# Altium PCB Main_Board.PcbDoc (part 7 of 14)
Units mm, origin at the board's own origin, x right, y up, seen from the top; angles counter-clockwise.
Board outline 142 x 82 mm, 10 copper layers (L1_Top, L2_PWR1, L3_Sig1, L4_GND1, L5_Sig2, L6_Sig3, L7_GND2, L8_Sig4, L9_GND3, L8_Bottom), stack 1.71 mm thick; 299 components, 328 nets, 2329 pads, 2908 vias.
Unrouted connection lines stored in the file: 2.
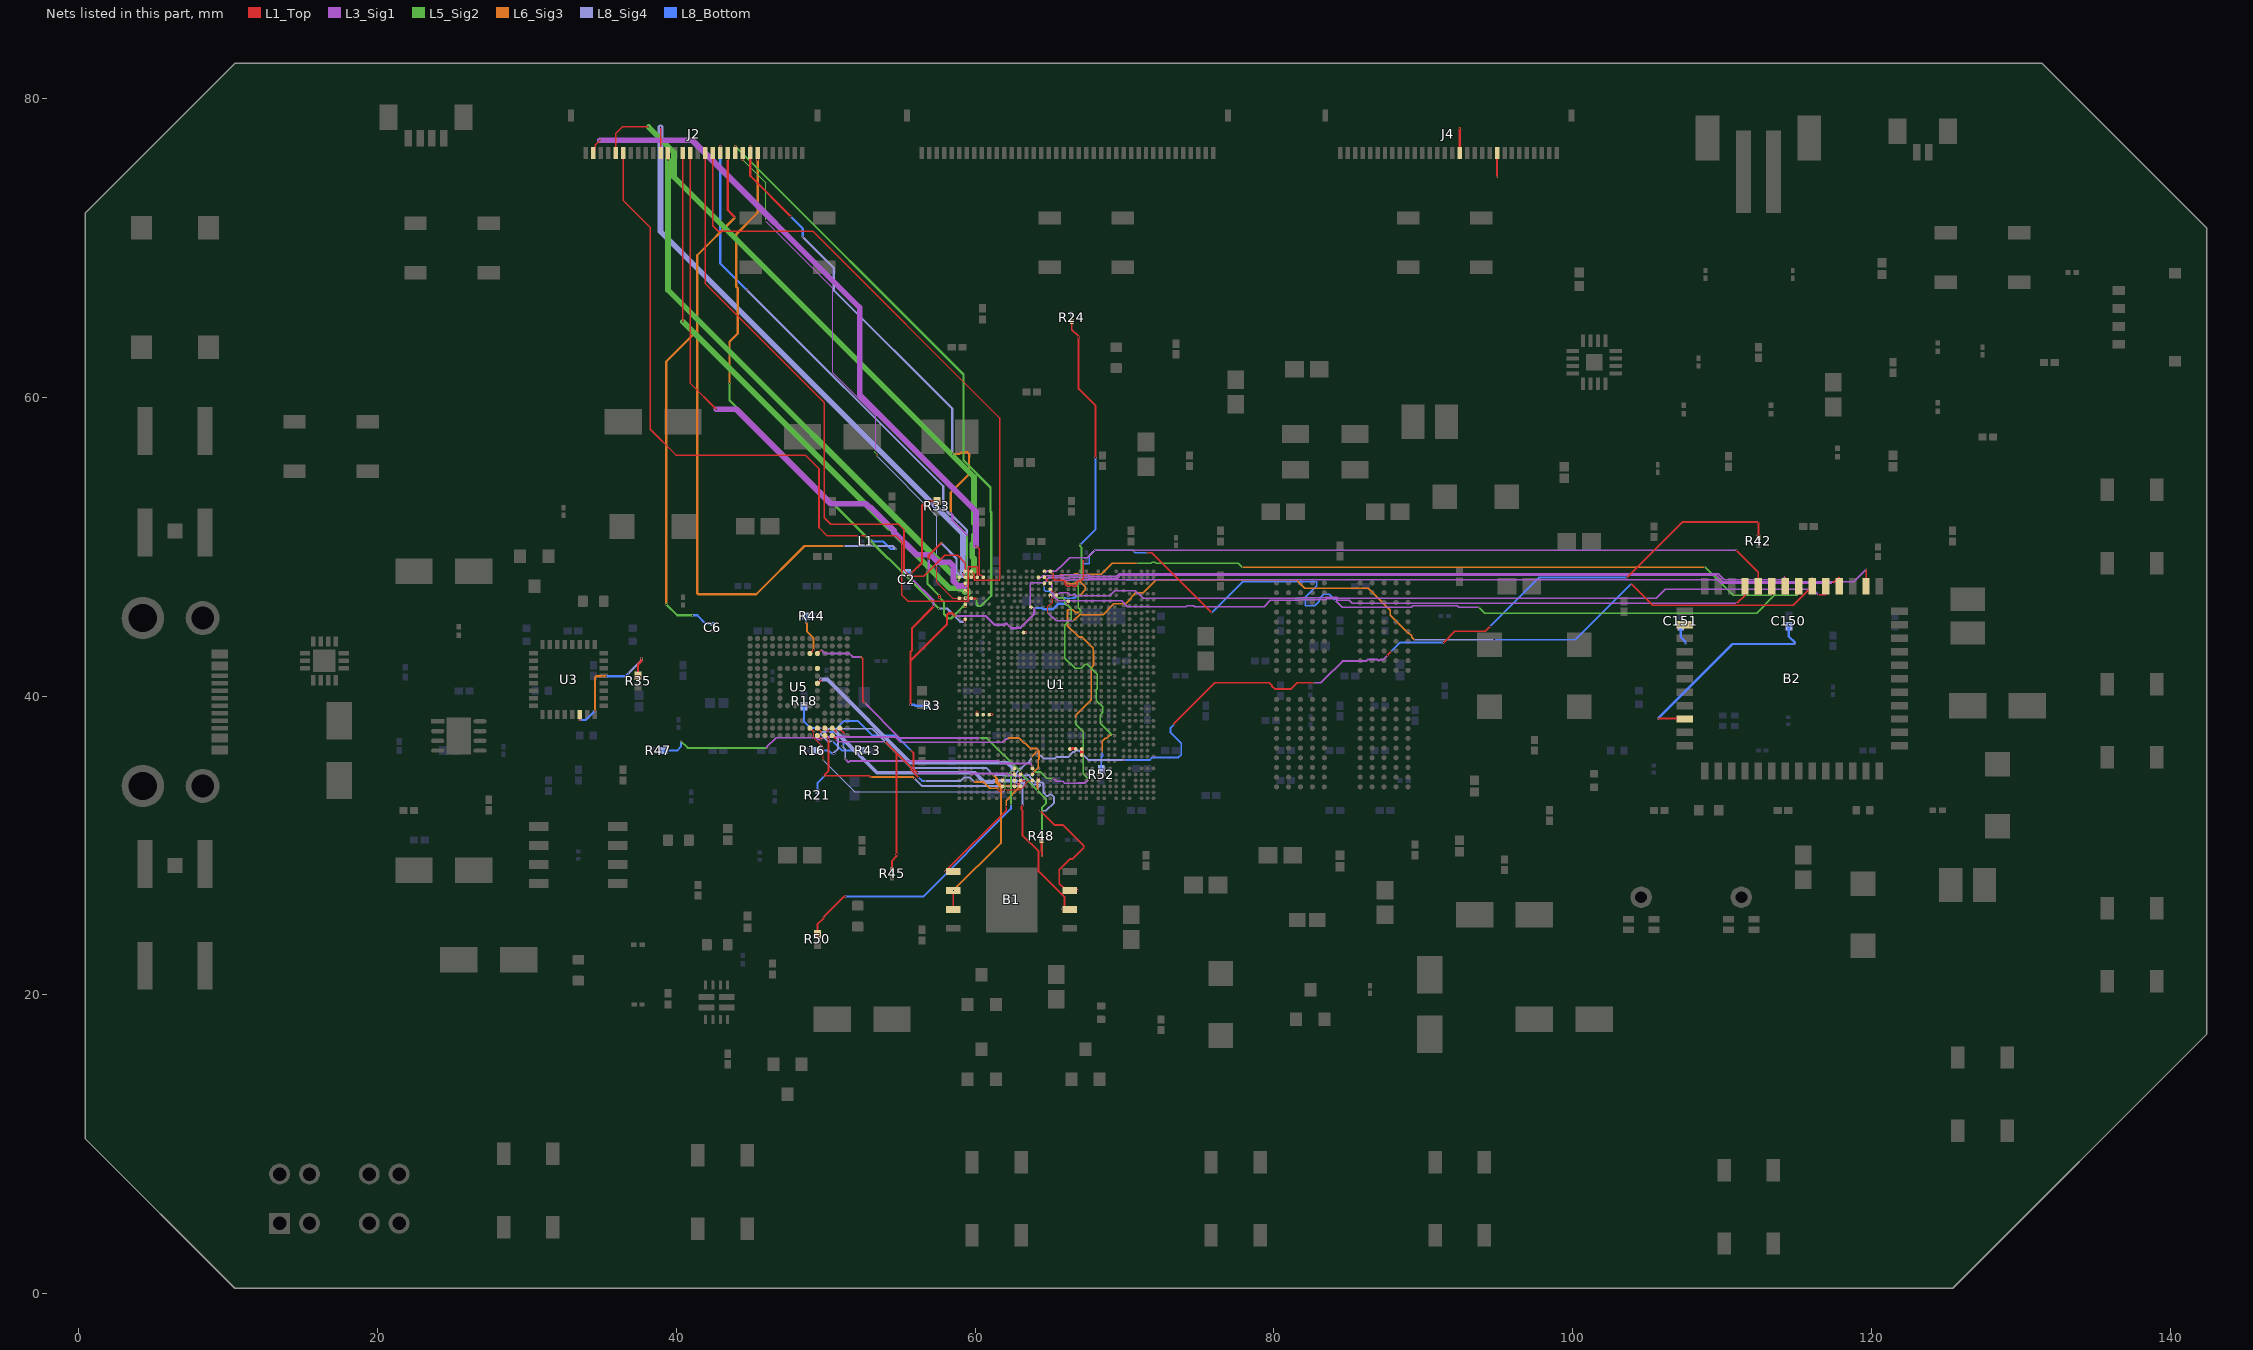
[diagram p14: the nets of this part, all layers, seen from the top]

## Via types
v1: diameter 0.1, hole 0.08, L1_Top to L8_Bottom, 1169 vias
v2: diameter 0.01, hole 0.01, L3_Sig1 to L8_Sig4, 433 vias
v3: diameter 0.01, hole 0.01, L8_Sig4 to L8_Bottom, 375 vias
v4: diameter 0.01, hole 0.01, L1_Top to L3_Sig1, 355 vias
v5: diameter 0.254, hole 0.01, L1_Top to L8_Bottom, 150 vias
v6: diameter 0.01, hole 0.01, L6_Sig3 to L8_Bottom, 129 vias
v7: diameter 0.05, hole 0.04, L1_Top to L8_Bottom, 104 vias
v8: diameter 0.01, hole 0.01, L1_Top to L5_Sig2, 89 vias
v9: diameter 0.01, hole 0.01, L1_Top to L8_Bottom, 41 vias
v10: diameter 0.1, hole 0.08, L1_Top to L3_Sig1, 17 vias
v11: diameter 0.1, hole 0.08, L1_Top to L5_Sig2, 11 vias
v12: diameter 0.1, hole 0.08, L8_Sig4 to L8_Bottom, 10 vias
v13: diameter 0.1, hole 0.08, L6_Sig3 to L8_Bottom, 9 vias
v14: diameter 1.27, hole 0.711, L1_Top to L8_Bottom, 8 vias
v15: diameter 0.4, hole 0.2, L1_Top to L8_Bottom, 4 vias
v16: diameter 0.05, hole 0.08, L1_Top to L8_Bottom, 3 vias
v17: diameter 0.05, hole 0.08, L6_Sig3 to L8_Bottom, 1 vias

## Nets (pads, with @x,y where several pads share a name; then routed paths per layer and width w, separated by ;. In a path a pad name is that pad's centre, name@x,y a point inside that pad or via, vN(x,y) a via of type N, cw(c..) or ccw(c..) an arc to the next point about the centre after c; other vN are vias at no path point) (continued)
BTUART_C_CTS_N: (continued)
  L8_Sig4 w0.1: v6(89.408,43.758) 89.43,43.78 v3(94.754,43.78)
  L8_Bottom w0.04: v4(65.041,46.662) 65.162,46.662 v3(65.286,46.538)
  L8_Bottom w0.1: v3(94.754,43.78) 100.177,43.78 v4(103.917,47.52)
  other v2: 65.286,46.538 65.041,46.662 103.917,47.52
  other v3: 65.041,46.662 103.917,47.52
  other v4: 65.286,46.538
BTUART_C_RTS_N: B2.43 U1.A18 | length 60.8
  L1_Top w0.1: U1.A18@65.041,48.349 65.041,48.309 65.156,48.194 v1(65.156,48.177) ; v1@65.185,48.206 65.216,48.174 65.249,48.174 65.246,48.172 65.246,47.868 65.368,47.747 65.92,47.747 66.041,47.625 66.041,47.473 66.161,47.354 66.322,47.354 66.397,47.429 66.486,47.429 66.561,47.354 66.722,47.354 66.841,47.473 66.841,47.625 66.961,47.744 67.112,47.744 67.236,47.868 67.236,49.146 v4(67.24,49.149) ; v4(71.5,49.588) 71.83,49.588 v3(75.845,45.573) ; v1(115.141,46.737) B2.43@115.141,47.349
  L3_Sig1 w0.1: v2(84.128,46.387) 84.587,45.928 89.187,45.928 89.294,46.035 92.268,46.035 92.367,45.936 v8(93.731,45.936)
  L5_Sig2 w0.1: v8(93.731,45.936) 94.126,45.541 112.316,45.541 113.511,46.737 v1(115.141,46.737)
  L8_Sig4 w0.1: v3(68.006,49.751) 70.556,49.751 v3(70.631,49.676)
  L8_Bottom w0.1: v4(67.24,49.149) 67.24,48.889 67.281,48.848 67.602,48.848 67.643,48.889 67.643,49.301 67.636,49.308 67.636,49.391 67.996,49.751 v3(68.006,49.751) ; v3(70.631,49.676) 70.719,49.588 v4(71.5,49.588) ; v3(75.845,45.573) 77.918,47.646 82.869,47.646 82.869,47.384 82.094,46.61 82.094,46.089 82.135,46.048 82.75,46.048 83.04,46.338 83.04,46.528 83.33,46.818 83.697,46.818 v2(84.128,46.387)
  other v2: 75.845,45.573 67.24,49.149 71.5,49.588
  other v3: 84.128,46.387 67.24,49.149 71.5,49.588
  other v4: 75.845,45.573
BTUART_C_RX: B2.40 U1.C18 | length 53.8
  L1_Top w0.1: U1.C18@65.041,47.549 65.041,47.551 v1(65.21,47.72) ; v1(117.421,47.542) 117.841,47.962 B2.40@117.841,47.349
  L3_Sig1 w0.1: v1(65.21,47.72) 65.739,47.72 65.864,47.844 65.926,47.844 65.941,47.829 65.964,47.829 66.039,47.754 66.322,47.754 66.337,47.769 109.696,47.769 109.924,47.542 v1(117.421,47.542)
BTUART_C_TX: B2.41 U1.D18 | length 53.6
  L1_Top w0.1: U1.D18@65.041,47.149 v1(65.236,46.955) ; v1(116.455,46.778) 116.941,46.778 B2.41@116.941,47.349
  L3_Sig1 w0.1: v1(65.236,46.955) 65.246,46.945 65.246,46.92 65.316,46.849 65.649,46.849 65.709,46.91 66.196,46.91 66.375,46.731 66.507,46.731 66.589,46.813 66.675,46.813 66.765,46.723 69.002,46.723 69.338,47.058 70.735,47.058 71.265,46.528 81.69,46.528 81.74,46.578 83.43,46.578 83.479,46.627 84.227,46.627 84.326,46.528 105.612,46.528 106.219,47.134 116.099,47.134 v1(116.455,46.778)
CMA_I2CM_C_SCL: J2.22 U1.E33 | length 36.5
  L1_Top w0.04: v4(45.98,71.797) v8(45.98,71.832) ; v4(57.441,48.663) 57.441,47.609 58.501,46.549 v1(59.116,46.549)
  L1_Top w0.152: v1(44.441,75.899) J2.22@44.441,76.349 ; U1.E33@58.941,46.549 v1(59.116,46.549)
  L3_Sig1 w0.04: v4(45.98,71.797) 50.48,67.297 50.48,61.628 53.35,58.758 v8(53.35,56.386)
  L5_Sig2 w0.04: v1(44.441,75.899) 45.98,74.361 v8(45.98,71.832) ; v8(53.35,56.386) 53.32,56.386 53.297,56.363 53.297,56.329 v2(53.438,56.188)
  L6_Sig3 w0.04: v6(53.438,56.045) v2(53.438,56.188)
  L8_Sig4 w0.04: v6(53.438,56.045) 57.441,52.042 v4(57.441,48.663)
  other v2: 57.441,48.663
CMA_I2CM_C_SDA: J2.23 U1.E32 | length 38.2
  L1_Top w0.152: v1(44.941,76.799) 44.941,74.827 v4(47.663,72.105)
  L3_Sig1 w0.152: v2(58.365,52.256) 58.466,52.155 58.466,51.765 59.327,50.904 59.327,50.893 59.459,50.761 v8(59.464,50.767)
  L5_Sig2 w0.152: v8(59.378,46.563) 59.617,46.802 59.617,47.106 59.518,47.205 59.518,47.382 59.424,47.475 59.424,49.379 59.464,49.419 v8(59.464,50.767)
  L6_Sig3 w0.152: v2(58.365,52.256) 58.365,53.62 59.588,54.843 59.588,55.966 59.615,55.994 59.615,56.179 59.485,56.31 59.3,56.31 59.282,56.292 59.036,56.292 58.942,56.199 v6(58.476,56.199)
  L8_Sig4 w0.152: v3(48.466,70.73) 50.545,68.651 50.545,67.171 58.476,59.24 v6(58.476,56.199)
  L8_Bottom w0.152: v4(47.663,72.105) 48.466,71.302 v3(48.466,70.73)
  other v2: 47.663,72.105
  other v3: 47.663,72.105
CMA_MCLK: C6.1 J2.20 L1.1 | length 70.2
  L1_Top w0.152: J2.20@43.441,76.349 v1(43.441,75.899) 43.441,72.532 v4(43.934,72.039)
  L5_Sig2 w0.152: v2(39.325,46.134) 40.059,45.4 v1(41.077,45.4)
  L6_Sig3 w0.152: v2(39.325,46.134) 39.325,62.392 41.404,64.471 ; v4(43.934,72.039) 41.404,69.509 41.404,46.888 41.475,46.817 45.351,46.817 48.584,50.05 v6(51.205,50.05)
  L8_Sig4 w0.152: v6(51.205,50.05) 54.463,50.05 v1(54.673,49.839)
  L8_Bottom w0.152: v1(41.077,45.4) 41.394,45.4 41.97,44.824 C6.1@42.441,44.824 ; L1.1@52.991,50.349 53.846,50.349 54.356,49.839 v1(54.673,49.839)
  other v2: 43.934,72.039
  other v3: 43.934,72.039
CMA_PWR: J2.19 U1.F32 | length 46.9
  L1_Top w0.152: J2.19@42.941,76.349 v1(42.941,76.799) ; v4(56.892,49.17) 56.892,49.401 v2(57.728,50.237) ; v8(57.607,46.717) 57.607,46.607 v8(57.629,46.585) ; v1(59.341,45.974) U1.F32@59.341,46.149
  L3_Sig1 w0.152: v8(56.81,48.373) 56.892,48.455 v4(56.892,49.17)
  L5_Sig2 w0.152: v8(56.81,48.373) 56.81,47.514 v8(57.607,46.717) ; v8(57.629,46.585) 57.924,46.29 57.924,45.483 58.22,45.188 58.388,45.188 59.174,45.974 v1(59.341,45.974)
  L8_Sig4 w0.152: v3(44.715,67.188) 57.863,54.04 57.863,52.615 58.323,52.155 58.386,52.155 59.451,51.09 59.451,48.15 59.282,47.981 59.045,47.981 58.753,48.273 58.753,49.212 v2(57.728,50.237)
  L8_Bottom w0.152: v1(42.941,76.799) 42.941,68.962 v3(44.715,67.188)
  other v4: 57.728,50.237
  other v8: 59.341,45.974
CMA_PWRDN: J2.24 U1.H32 | length 39.5
  L1_Top w0.152: v1(45.441,75.899) J2.24@45.441,76.349 ; v1(59.297,44.974) 59.297,45.095 59.341,45.095 U1.H32@59.341,45.149
  L5_Sig2 w0.152: v2(43.56,60.918) 43.56,59.807 54.164,49.203 54.224,49.203 v2(57.563,45.864)
  L6_Sig3 w0.152: v2(43.56,60.918) 43.56,63.722 44.105,64.268 44.105,67.296 44.02,67.382 44.02,70.93 45.441,72.351 v1(45.441,75.899)
  L8_Sig4 w0.152: v2(57.563,45.864) 58.118,45.864 59.008,44.974 v1(59.297,44.974)
CMA_RST_L: J2.21 U1.E31 | length 39.7
  L1_Top w0.152: J2.21@43.941,76.349 v1(43.941,76.799) ; U1.E31@59.741,46.549 59.76,46.531 60.056,46.531 v8(60.087,46.499)
  L5_Sig2 w0.152: v1(43.941,76.799) 59.218,61.522 59.218,55.78 61.038,53.96 61.038,52.357 61.077,52.319 61.077,46.718 60.381,46.023 60.176,46.023 60.087,46.112 v8(60.087,46.499)
CPU_RESET: C2.1 R3.2 R33.2 U1.F15 | length 31.3
  L1_Top w0.152: v1(55.669,39.413) 55.669,42.359 ; v1(55.766,48.249) 56.44,48.923 56.44,52.72 56.777,53.058 R33.2@57.441,53.058 ; v4(57.222,45.991) 55.771,44.54 55.771,43.066 55.669,42.965 55.669,42.359 ; v4(58.663,45.353) 58.483,45.533 58.22,45.533 58.119,45.432 58.119,44.809 55.669,42.359 ; v1(66.2,46.186) 66.223,46.208 66.223,46.331 U1.F15@66.241,46.349
  L3_Sig1 w0.152: v1(55.766,48.249) 55.766,47.848 57.222,46.392 v4(57.222,45.991) ; v4(58.663,45.353) 60.719,45.353 61.302,44.771 61.933,44.771 62.006,44.843 62.127,44.843 62.429,44.541 62.751,44.541 62.778,44.567 63.041,44.567 63.964,45.49 v3(63.964,45.899)
  L8_Bottom w0.152: C2.1@55.441,48.249 v1(55.766,48.249) ; v1(55.669,39.413) 55.932,39.413 55.995,39.349 R3.2@56.791,39.349 ; v3(63.964,45.899) 64.452,45.899 64.548,45.803 65.209,45.803 65.592,46.186 v1(66.2,46.186)
  other v2: 63.964,45.899
  other v4: 63.964,45.899
CPU_RST_INT: R35.2 U3.14 | length 9.1
  L1_Top w0.152: v1(33.541,38.399) U3.14@33.541,38.749 ; R35.2@37.441,41.349 37.441,42.118 37.664,42.341 v1(37.664,42.523)
  L6_Sig3 w0.152: v6(34.551,39.017) 34.551,41.227 34.64,41.316 v6(35.299,41.316)
  L8_Sig4 w0.152: v3(36.81,41.547) 37.664,42.401 v1(37.664,42.523)
  L8_Bottom w0.152: v1(33.541,38.399) 33.933,38.399 v6(34.551,39.017) ; v3(35.046,41.272) 35.09,41.316 v6(35.299,41.316) 36.579,41.316 v3(36.81,41.547)
  other v2: 35.046,41.272
CPUA_MODE: J4.17 | length 1.7
  L1_Top w0.152: J4.17@92.441,76.349 v1(92.441,78.005)
CPUB_MODE: J4.22 | length 1.6
  L1_Top w0.152: v1(94.941,74.764) J4.22@94.941,76.349
CSI_A_CLKN: J2.17 U1.A32 | length 41.7
  L1_Top w0.102: J2.17@41.941,76.349 41.941,67.622 49.907,59.657 49.907,51.935 50.339,51.503 54.872,51.503 55.241,51.135 55.241,48.442 55.66,48.023 56.567,48.023 57.964,49.42 58.835,49.42 59.341,48.914 U1.A32@59.341,48.349
CSI_A_CLKP: J2.18 U1.A31 | length 42.6
  L1_Top w0.102: J2.18@42.441,76.349 42.441,71.478 42.807,71.112 49.145,71.112 61.642,58.615 61.642,47.779 61.616,47.753 59.965,47.753 59.94,47.779 59.94,48.151 U1.A31@59.741,48.349
CSI_A_D0N: J2.14 U1.D32 | length 37.9
  L1_Top w0.102: v1(40.441,65.058) J2.14@40.441,76.349 ; v1(59.33,46.957) 59.341,46.957 U1.D32@59.341,47.049
  L5_Sig2 w0.381: v1(40.441,65.058) 54.23,51.269 54.34,51.269 54.575,51.034 54.575,50.924 56.839,48.66 56.929,48.66 57.097,48.492 57.097,48.403 58.289,47.211 59.076,47.211 v1(59.33,46.957)
CSI_A_D0P: J2.15 U1.C32 | length 40.3
  L1_Top w0.102: J2.15@40.941,76.349 40.941,60.926 v10(42.668,59.199) ; v1(59.33,47.363) 59.341,47.374 U1.C32@59.341,47.549
  L3_Sig1 w0.381: v10(42.668,59.199) 44.014,59.199 50.339,52.875 52.675,52.875 52.91,52.64 52.999,52.64 54.575,51.064 54.575,50.975 56.093,49.457 57.011,49.457 57.513,48.954 58.297,48.954 58.54,48.712 58.54,47.706 58.883,47.363 v1(59.33,47.363)
CSI_A_D1N: J2.11 U1.B32 | length 40.3
  L1_Top w0.102: J2.11@38.941,76.349 v1(38.941,78.072) ; v1(59.163,48.268) 59.163,48.167 59.341,47.989 U1.B32@59.341,47.949
  L8_Sig4 w0.381: v1(38.941,78.072) 38.941,71.105 59.164,50.882 v1@59.164,48.269
CSI_A_D1P: J2.12 U1.B33 | length 36.8
  L1_Top w0.102: v1(39.442,75.887) J2.12@39.441,76.349 ; v1(58.801,47.814) 58.936,47.949 U1.B33@58.941,47.949
  L5_Sig2 w0.381: v1(39.442,75.887) 39.442,67.172 v1(58.801,47.814)
CSI_A_D2N: J2.5 U1.B31 | length 43.1
  L1_Top w0.102: J2.5@35.941,76.349 35.941,77.652 36.386,78.097 v11(38.147,78.097) ; v16(59.711,48.15) 59.741,48.12 U1.B31@59.741,47.949
  L5_Sig2 w0.381: v11(38.147,78.097) 39.848,76.395 39.848,74.744 59.927,54.666 59.927,51.563 60.015,51.475 60.015,50.845 59.927,50.758 59.927,50.284 59.806,50.163 59.806,49.325 59.927,49.204 59.927,48.366 v16(59.711,48.15)
CSI_A_D2P: J2.6 U1.B30 | length 53.3
  L1_Top w0.102: J2.6@36.441,76.349 36.441,73.169 38.248,71.363 38.248,57.853 39.975,56.126 48.637,56.126 49.551,55.212 49.551,51.275 50.11,50.716 54.72,50.716 55.088,50.347 55.088,46.766 55.507,46.347 59.516,46.347 59.541,46.372 59.541,48.633 59.567,48.658 60.116,48.658 60.141,48.633 U1.B30@60.141,47.949
CSI_A_D3N: J2.2 U1.B29 | length 44.6
  L1_Top w0.102: J2.2@34.441,76.349 34.441,76.448 34.56,76.567 34.56,76.872 v16(34.895,77.208) ; v1(60.067,50.055) 60.27,49.852 60.27,48.15 60.346,48.074 60.416,48.074 U1.B29@60.541,47.949
  L3_Sig1 w0.381: v16(34.895,77.208) 41.068,77.208 52.269,66.007 52.269,60.165 60.067,52.367 v1(60.067,50.055)